# Altium PCB djb_v2_rigid_left_2.PcbDoc
Units mm, origin at the board's own origin, x right, y up, seen from the top; angles counter-clockwise.
Board outline 29 x 14.62 mm, 4 copper layers (Top Layer, Inner 1, Inner 2, Bottom Layer), stack 0.59 mm thick; 77 components, 44 nets, 258 pads, 92 vias.
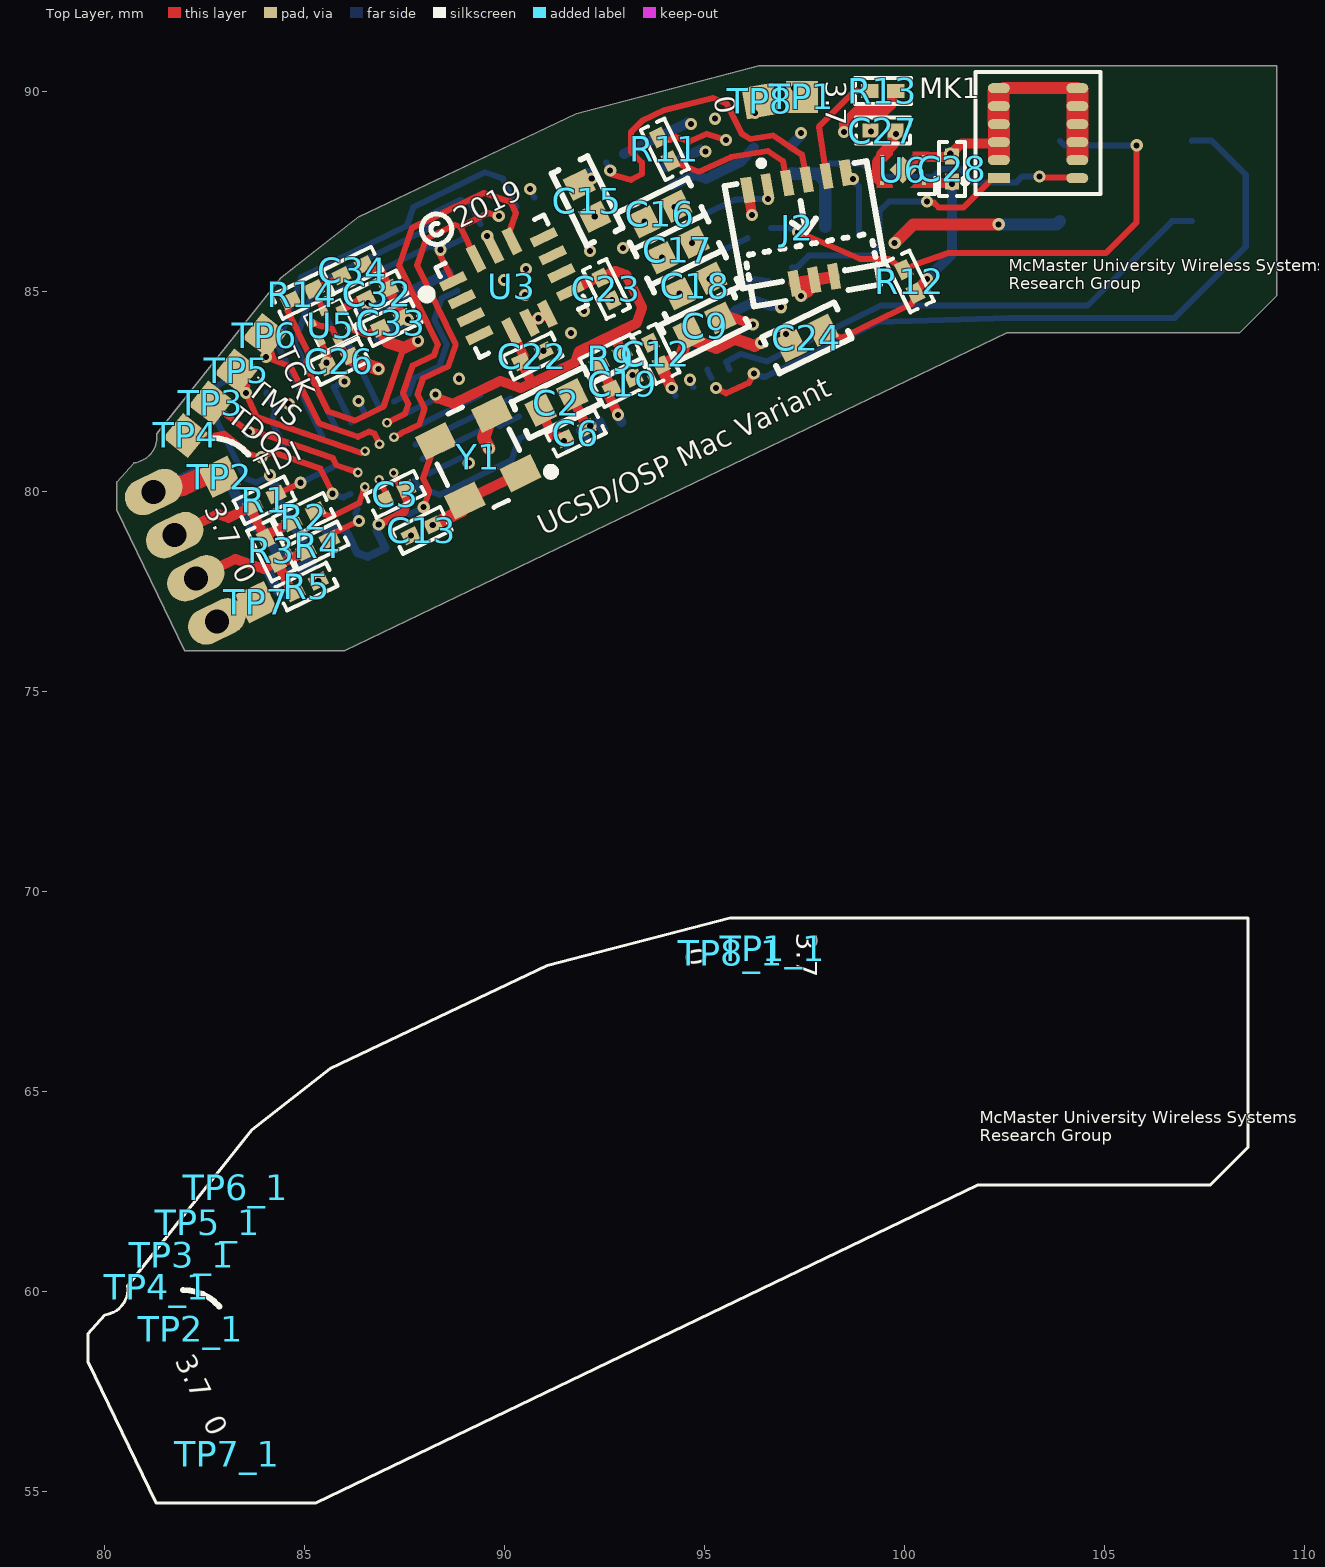
[diagram p0: Top Layer view]
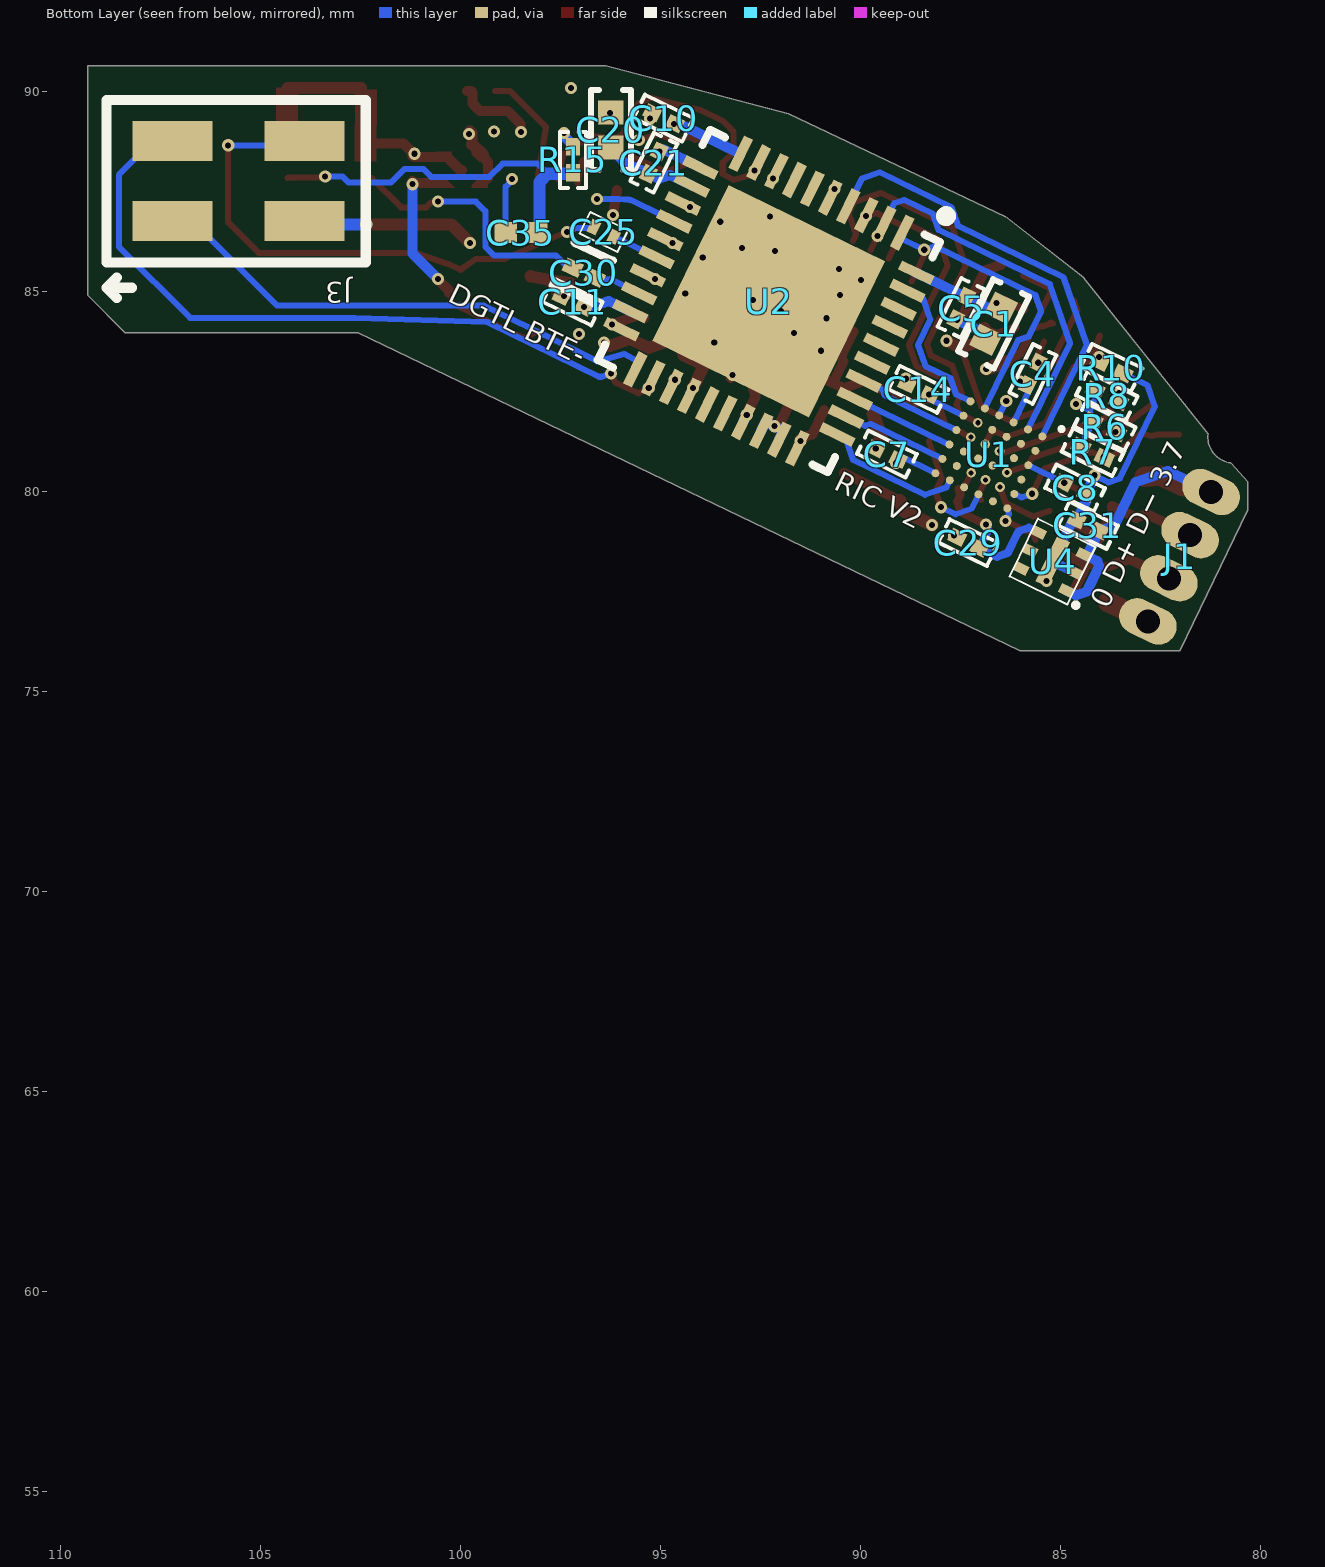
[diagram p1: Bottom Layer view, seen from below]
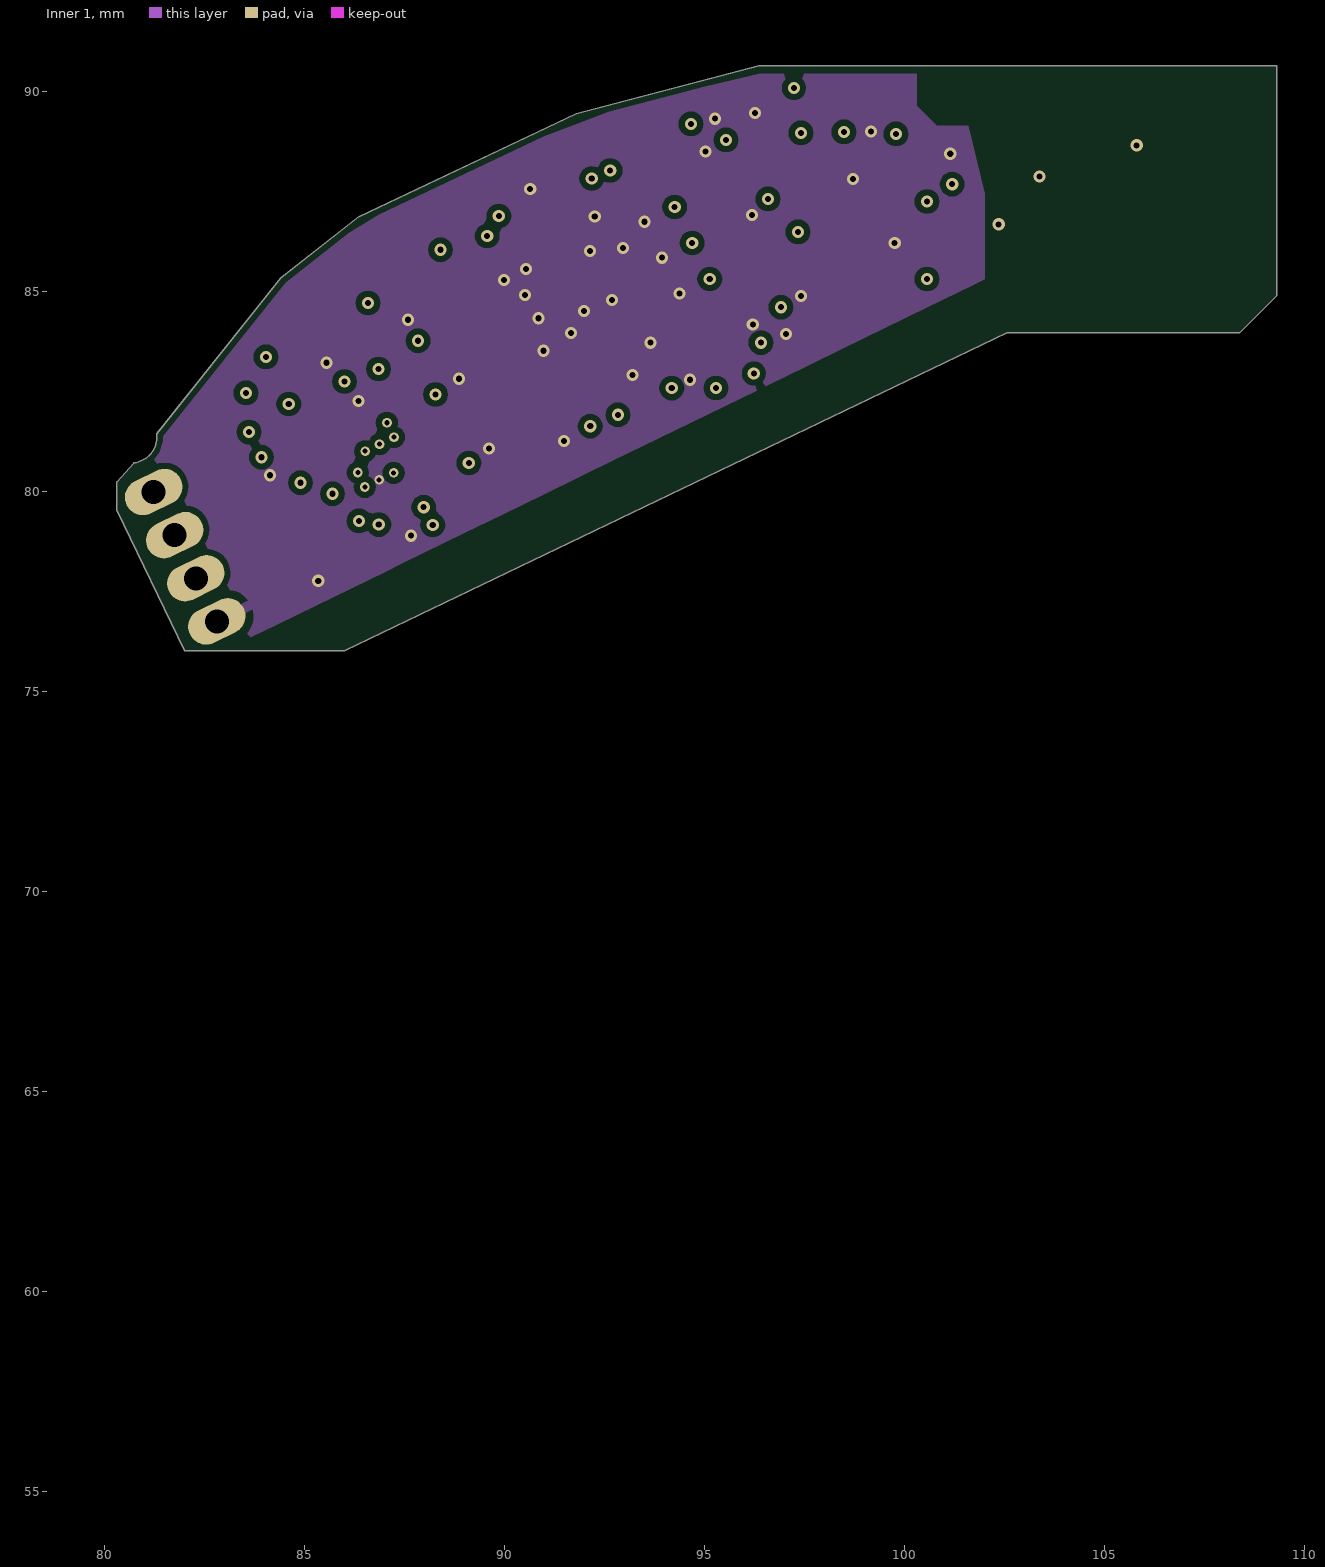
[diagram p2: Inner 1]
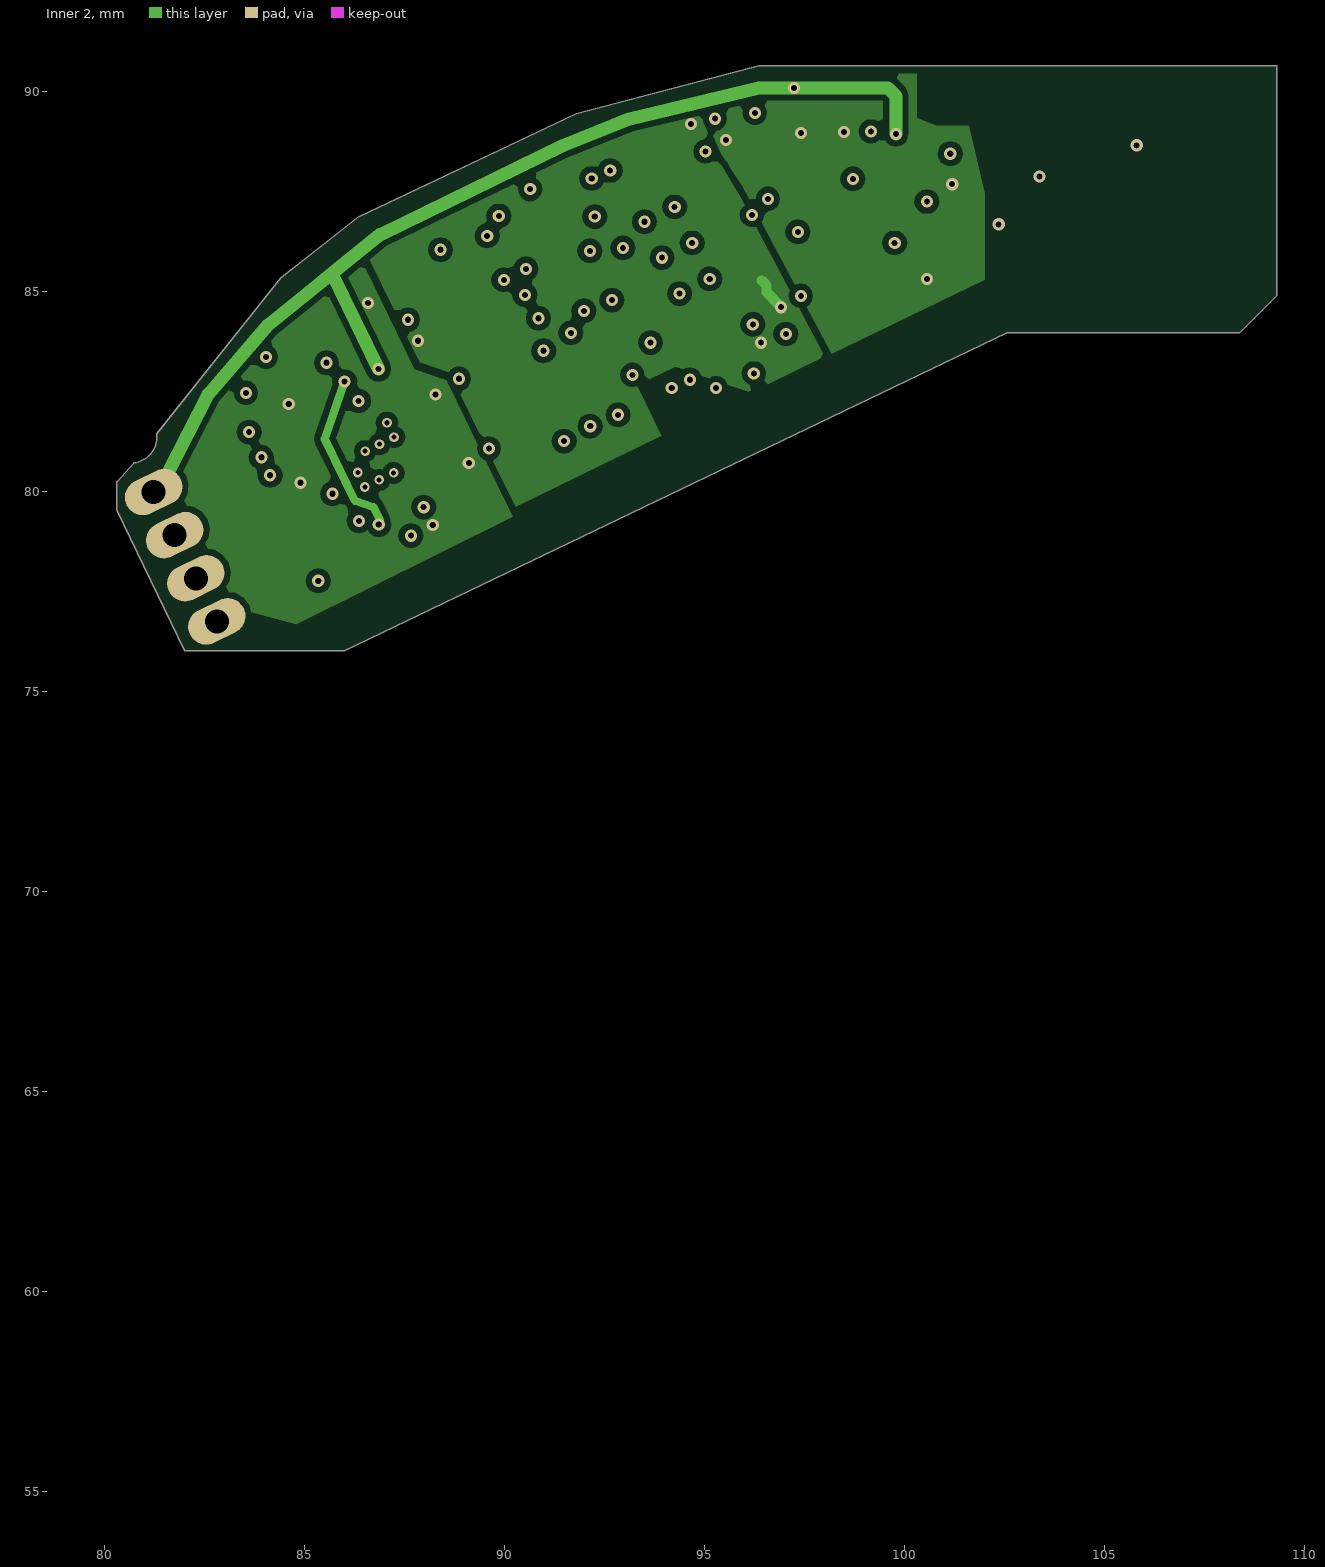
[diagram p3: Inner 2]

## Layer stack, top to bottom
Top Solder: solder mask 0.0102, Solder Resist, Dk 3.5
Top Layer: signal copper 0.0356
Dielectric 1: prepreg 0.0711, PP-006, Dk 4.1
Inner 1: signal copper 0.036
Dielectric 3: core 0.3048, Core-029, Dk 4.7
Inner 2: signal copper 0.036
Dielectric 2: prepreg 0.0711, PP-006, Dk 4.1
Bottom Layer: signal copper 0.0356
Bottom Solder: solder mask 0.0102, Solder Resist, Dk 3.5

## Board outline
80.307,79.538 80.307,80.238 80.732,80.713 ccw(c80.654,81.363) 81.304,81.441 84.407,85.338 86.363,86.871 91.791,89.446 96.36,90.638 109.307,90.638 109.307,84.899 108.371,83.963 102.557,83.963 85.999,76.013 82.007,76.013

## Design rules (kind name [scope] priority, off if disabled: settings)
BoardOutlineClearance BoardOutlineClearance_Silk [OnLayer('Top Overlay') Or OnLayer('Bottom Overlay')] p1: gap=0 ignorepadtopadclearanceinfootprint=FALSE
BoardOutlineClearance BoardOutlineClearance_Normal [All] p2: gap=0.152 ignorepadtopadclearanceinfootprint=FALSE
Clearance [All] p1: gap=0.152 ignorepadtopadclearanceinfootprint=FALSE
ComponentClearance [All] p1: gap=0 collisioncheckmode=3 verticalgap=0 showdistances=FALSE
DiffPairsRouting [All] p1: maxlimit=0.254 minlimit=0.152 mostfreqgap=0.254 toplayer_minwidth=0.152 toplayer_maxwidth=0.381 toplayer_prefwidth=0.254 midlayer1_minwidth=0.152 midlayer1_maxwidth=0.381 midlayer1_prefwidth=0.254 midlayer2_minwidth=0.152 midlayer2_maxwidth=0.381 midlayer2_prefwidth=0.254 bottomlayer_minwidth=0.152 bottomlayer_maxwidth=0.381 bottomlayer_prefwidth=0.254 maxuncoupledlength=12.7
MinimumSolderMaskSliver [All] p1: minsoldermaskwidth=0.006
PasteMaskExpansion [All] p1 off: expansion=0
PlaneClearance [All] p1: clearance=0.254
PlaneConnect PlaneConnect_Via [IsVia] p1: planeconnectstyle=Direct reliefexpansion=0.254 reliefentries=4 reliefconductorwidth=0.254 reliefairgap=0.203
PlaneConnect PlaneConnect_Normal [All] p2: pad.planeconnectstyle=Relief pad.reliefexpansion=0.254 pad.reliefentries=4 pad.reliefconductorwidth=0.254 pad.reliefairgap=0.203 via.planeconnectstyle=Direct via.reliefexpansion=0.254 via.reliefentries=4 via.reliefconductorwidth=0.254 via.reliefairgap=0.203
PolygonConnect PolygonConnect_Normal [All] p1: thpad.connectstyle=Relief thpad.reliefconductorwidth=0.254 thpad.reliefentries=4 thpad.polygonreliefangle="90 Angle" thpad.airgapwidth=0.203 smdpad.connectstyle=Relief smdpad.reliefconductorwidth=0.254 smdpad.reliefentries=4 smdpad.polygonreliefangle="90 Angle" smdpad.airgapwidth=0.203 via.connectstyle=Direct via.reliefconductorwidth=0.254 via.reliefentries=4 via.polygonreliefangle="90 Angle" via.airgapwidth=0.254
RoutingVias [All] p1: holewidth=0.152 width=0.305 viastyle="Through Hole" minholewidth=0.127 minwidth=0.241 maxholewidth=1.27 maxwidth=2.54
SilkToSilkClearance [All] p1: silktosilkclearance=-25.4
SilkToSolderMaskClearance [IsPad] p1: minsilkscreentomaskgap=-25.4 clearancetoexposedcopper=TRUE
SolderMaskExpansion [All] p1 off: expansion=0.102 istentingtop=FALSE
Width [All] p1: maxlimit=2.54 minlimit=0.152 preferedwidth=0.152
22 further rules are at their usual default settings.

## Components (designator, comment, footprint, x,y, rotation, side; value= is the part's Value field where it differs from the comment)
C1 "10uF" "CAP 0402/1005" 86.664,84.189 r116 bottom
C2 "10uF" "CAP 0402/1005" 91.296,82.22 r26 top
C3 "0.10uF" "CAP 0201/0603" 87.264,79.925 r206 top
C4 "0.10uF" "CAP 0201/0603" 85.684,82.937 r296 bottom
C5 "0.10uF" "CAP 0201/0603" 87.473,84.583 r296 bottom
C6 "0.10uF" "CAP 0201/0603" 91.781,81.455 r206 top
C7 "0.10uF" "CAP 0201/0603" 89.331,80.933 r26 bottom
C8 "0.10uF" "CAP 0201/0603" 84.627,80.085 r26 bottom
C9 "10uF" "CAP 0402/1005" 94.998,84.142 r26 top
C10 "0.10uF" "CAP 0201/0603" 94.915,89.331 r206 bottom
C11 "0.10uF" "CAP 0201/0603" 97.188,84.738 r206 bottom
C12 "0.10uF" "CAP 0201/0603" 93.784,83.439 r296 top
C13 "0.10uF" "CAP 0201/0603" 87.926,79.024 r26 top
C14 "0.10uF" "CAP 0201/0603" 88.542,82.551 r26 bottom
C15 "10uF" "CAP 0402/1005" 92.062,87.266 r296 top
C16 "10uF" "CAP 0402/1005" 93.892,86.935 r206 top
C17 "10uF" "CAP 0402/1005" 94.33,86.036 r206 top
C18 "10uF" "CAP 0402/1005" 94.769,85.137 r206 top
C19 "1uF" "CAP 0201/0603" 92.956,82.695 r206 top
C20 "10uF" "CAP 0402/1005" 96.231,89.038 r90 bottom
C21 "0.10uF" "CAP 0201/0603" 95.157,88.219 r296 bottom
C22 "0.10uF" "CAP 0201/0603" 90.697,83.38 r206 top
C23 "0.10uF" "CAP 0201/0603" 92.547,85.061 r116 top
C24 "10uF" "CAP 0402/1005" 97.557,83.838 r26 top
C25 "CL03A105KQ3CSNH" CL03A105KQ3CSNH 96.407,86.488 r206 bottom
C26 "1uF" "CAP 0201/0603" 85.866,83.248 r26 top
C27 "1uF" "CAP 0201/0603" 99.457,89.018 r0 top
C28 "1uF" "CAP 0201/0603" 101.189,88.063 r270 top
C29 "1uF" "CAP 0201/0603" 87.297,78.717 r206 bottom
C30 "GRM033R60J155ME14D" FP-GRM033-0_03-IPC_B 96.909,85.467 r25 bottom
C31 "1uF" "CAP 0201/0603" 84.305,79.149 r206 bottom
C32 "1uF" "CAP 0201/0603" 86.822,84.939 r206 top
C33 "1uF" "CAP 0201/0603" 87.172,84.22 r206 top
C34 "1uF" "CAP 0201/0603" 86.201,85.526 r206 top
C35 "CL03A104KQ3NNNC" CAPC0603X33X15ML03T05 98.482,86.469 r180 bottom
J1 "PIGTAIL" PIGTAIL 82.016,78.367 r116 bottom
J2 "FFC" HIROSE_FH58M-7S-0.25SHW-99 97.432,87.063 r190 top
J3 "M22-6550242R" M22-6550242R 105.537,87.757 r90 bottom
MK1 "VA1200AA" VA1200AA 104.317,87.832 r180 top
R1 "2k" "RES 0201/0603" 83.998,79.778 r26 top
R2 "100" "RES 0201/0603" 84.978,79.366 r26 top
R3 "115" "RES 0201/0603" 84.164,78.525 r116 top
R4 "100" "RES 0201/0603" 85.328,78.647 r26 top
R5 "2k" "RES 0201/0603" 85.05,77.621 r206 top
R6 "4.7k" "RES 0201/0603" 83.882,81.613 r26 bottom
R7 "4.7k" "RES 0201/0603" 84.189,80.984 r26 bottom
R8 "4.7k" "RES 0201/0603" 83.832,82.388 r26 bottom
R9 "1k" "RES 0201/0603" 92.649,83.325 r206 top
R10 "2.2k" "RES 0201/0603" 83.718,83.091 r26 bottom
R11 "1k" "RES 0201/0603" 94.007,88.552 r116 top
R12 "1k" "RES 0201/0603" 100.132,85.25 r296 top
R13 "1k" "RES 0201/0603" 99.457,90.013 r0 top
R14 "3k" "RES 0201/0603" 84.943,84.912 r26 top
R15 "1k" "RES 0201/0603" 97.182,88.288 r270 bottom
TP1 "TP_SMD_DJB" TP_SMD_DJB#1 97.432,89.863 r90 top
TP1_1 "TP_SMD_DJB" TP_SMD_DJB#2 96.707,68.563 r90 top (schematic designator TP1)
TP2 "TP_SMD_DJB" TP_SMD_DJB#1 82.882,80.363 r116 top
TP2_1 "TP_SMD_DJB" TP_SMD_DJB#2 82.157,59.063 r116 top (schematic designator TP2)
TP3 "TP_SMD_DJB" TP_SMD_DJB#3 82.657,82.213 r116 top
TP3_1 "TP_SMD_DJB" TP_SMD_DJB#4 81.932,60.913 r116 top (schematic designator TP3)
TP4 "TP_SMD_DJB" TP_SMD_DJB#3 82.025,81.4 r115 top
TP4_1 "TP_SMD_DJB" TP_SMD_DJB#4 81.3,60.1 r115 top (schematic designator TP4)
TP5 "TP_SMD_DJB" TP_SMD_DJB#3 83.307,83.013 r116 top
TP5_1 "TP_SMD_DJB" TP_SMD_DJB#4 82.582,61.713 r116 top (schematic designator TP5)
TP6 "TP_SMD_DJB" TP_SMD_DJB#3 84.007,83.902 r116 top
TP6_1 "TP_SMD_DJB" TP_SMD_DJB#4 83.282,62.602 r116 top (schematic designator TP6)
TP7 "TP_SMD_DJB" TP_SMD_DJB#1 83.794,77.231 r116 top
TP7_1 "TP_SMD_DJB" TP_SMD_DJB#2 83.069,55.931 r116 top (schematic designator TP7)
TP8 "TP_SMD_DJB" TP_SMD_DJB#5 96.382,89.763 r90 top
TP8_1 "TP_SMD_DJB" TP_SMD_DJB#6 95.657,68.463 r90 top (schematic designator TP8)
U1 "LCMXO3LF-1300E-XUWG36" BGA36_WLCS_25X25_MACHXO3 86.782,80.914 r296 bottom
U2 "ADAU1372" QFN40_LFCSP_WQ_6mmx6mm 92.283,84.759 r296 bottom
U3 "BMI160" LGA14R50P5X4_300X250X83 90.178,85.129 r26 top
U4 "MIC5367 LDO 1.2V" "LDO 1.2V" 85.19,78.246 r116 bottom
U5 "MIC5380/1-xxYFT" "06L FCSTSLP" 85.651,84.145 r206 top
U6 "MIC5504-1.8YMT" MICREL_DFN4 99.957,88.038 r90 top
Y1 "12.288 MHz" OSC_2.5X2.0MM 90.4,80.453 r116 top

## Footprints (in the part's own frame and the unit in brackets; to place one, negate y for a bottom-side part, rotate by r counter-clockwise, add the part's x,y. Pads: shape width x height; smd on the part's side, far side on the other; paste and mask are expansions set on the pad)
"06L FCSTSLP" [mm] "6-Pin 1mm x 1mm Thin MLF®   (FT)"
  oct 0.2x0.2 smd mask+0.01: 1(-0.4,0.25)
  rect 0.2x0.2 smd mask+0.01: 2(-0.4,-0.25) 3(0,-0.4) 4(0.4,-0.25) 5(0.4,0.25) 6(0,0.4)
  silkscreen extent -0.65,-0.5 0.5,0.5, body extent -0.5,-0.5 0.5,0.5, height 0.5
BGA36_WLCS_25X25_MACHXO3 [mm] "Lattice MachXO3 WLCSP36"
  round 0.2 smd: A1(-1,1) A2(-0.6,1) A3(-0.2,1) A4(0.2,1) A5(0.6,1) A6(1,1) B1(-1,0.6) B2(-0.6,0.6) B3(-0.2,0.6) B4(0.2,0.6) B5(0.6,0.6) B6(1,0.6) C1(-1,0.2) C2(-0.6,0.2) C3(-0.2,0.2) C4(0.2,0.2) C5(0.6,0.2) C6(1,0.2) D1(-1,-0.2) D2(-0.6,-0.2) D3(-0.2,-0.2) D4(0.2,-0.2) D5(0.6,-0.2) D6(1,-0.2) E1(-1,-0.6) E2(-0.6,-0.6) E3(-0.2,-0.6) E4(0.2,-0.6) E5(0.6,-0.6) E6(1,-0.6) F1(-1,-1) F2(-0.6,-1) F3(-0.2,-1) F4(0.2,-1) F5(0.6,-1) F6(1,-1)
  silkscreen extent -1.42,1.3 -1.33,1.4, body extent -1.27,-1.24 1.27,1.24, height 0.58
"CAP 0201/0603" [mm] "Chip Capacitor, 2-Leads, Body 0.60x0.30mm, IPC Medium Density"
  rect 0.4x0.35 smd: 1(-0.31,0) 2(0.31,0)
  silkscreen extent -0.68,-0.33 0.68,0.33, body extent -0.3,-0.15 0.3,0.15, height 0.3
"CAP 0402/1005" [mm] "Chip Capacitor, 2-Leads, Body 1.02x0.51mm, IPC Medium Density"
  rect 0.6x0.64 smd: 1(-0.44,0) 2(0.44,0)
  silkscreen extent -1,-0.5 1,0.5, body extent -0.5,-0.26 0.5,0.26, height 0.52
CAPC0603X33X15ML03T05 [mm] "Chip Capacitor, 2-Leads, Body 0.60x0.30mm, IPC Low Density"
  rect 0.56x0.52 smd: 1(-0.38,0) 2(0.38,0)
  body extent -0.32,-0.17 0.32,0.17, height 0.33
CL03A105KQ3CSNH [mm]
  rect 0.25x0.35 smd mask+0.05: 1(-0.275,0) 2(0.275,0)
  silkscreen extent -0.53,-0.3 0.52,0.3, body extent -0.3,-0.15 0.3,0.15, height 0.3
FP-GRM033-0_03-IPC_B [mm]
  rect 0.454x0.363 smd paste+0 mask+0: 1(-0.304,0) 2(0.304,0)
  silkscreen extent -0.53,-0.58 0.53,0.58, body extent -0.3,-0.15 0.3,0.15, height 0.33
HIROSE_FH58M-7S-0.25SHW-99 [mm] "Hirose FH58M-7S-0.25SHW(99) Top+Bottom Contacts 7-pin FFC Connector"
  rect 0.25x0.65 smd: 1(0.75,-0.7) 2(0.5,1.8) 3(0.25,-0.7) 4(0,1.8) 5(-0.25,-0.7) 6(-0.5,1.8) 7(-0.75,-0.7)
  rect 0.27x0.65 smd: S(-1.25,-0.7) S(1.25,-0.7)
  silkscreen extent -1.8,-1.32 1.8,2.2, body extent -1.75,-0.91 1.75,2.19, height 0.9
"LDO 1.2V" [mm] "6-Pin 1.6mmx1.6mm Thin MLF (MT)"
  rect 0.25x0.35 smd mask+0.01: 1(-0.5,-0.625) 2(0,-0.625) 3(0.5,-0.625) 4(0.5,0.625) 5(0,0.625) 6(-0.5,0.625)
  rect 1.26x0.35 smd mask+0.01: 7(0,0)
  silkscreen extent -0.8,-1.06 0.8,0.8, body extent -0.8,-0.8 0.8,0.8, height 0.8
LGA14R50P5X4_300X250X83 [mm]
  rect 0.675x0.25 smd: 1(-1.262,0.75) 2(-1.263,0.25) 3(-1.263,-0.25) 4(-1.262,-0.75) 8(1.262,-0.75) 9(1.262,-0.25) 10(1.263,0.25) 11(1.262,0.75)
  rect 0.25x0.675 smd: 5(-0.5,-1.013) 6(0,-1.013) 7(0.5,-1.013) 12(0.5,1.013) 13(0,1.013) 14(-0.5,1.012)
  silkscreen extent -2.1,-1.25 1.5,1.25, body extent -1.52,-1.27 1.52,1.27, height 0.83
M22-6550242R [mm] "4 Position Receptacle Connector 0.079\" (2.00mm) Surface Mount, Right Angle Gold"
  rect 1x2 smd: 1(-1,1.65) 2(1,1.65) 3(1,-1.65) 4(-1,-1.65)
  silkscreen extent -2.92,-3.18 2.03,3.3, body extent -2.15,-2.29 2.15,10.16, height 4.01
MICREL_DFN4 [mm] "Micrel DFN-4 from MIC5504-1.8YMT datasheet"
  rect 0.1x0.1 smd: 1(-0.325,-0.525) 2(0.325,-0.525) 3(0.325,0.525) 4(-0.325,0.525)
  rect 0.48x0.48 smd rot 45: EP(0,0)
  Top Layer region: -0.45,-0.18 -0.45,-0.65 -0.2,-0.65 -0.2,-0.43
  Top Layer region: 0.45,-0.65 0.2,-0.65 0.2,-0.43 0.38,-0.25 0.45,-0.25
  Top Layer region: -0.45,0.65 -0.2,0.65 -0.2,0.43 -0.38,0.25 -0.45,0.25
  Top Layer region: 0.45,0.65 0.2,0.65 0.2,0.43 0.38,0.25 0.45,0.25
  silkscreen extent -0.6,-0.8 -0.2,-0.4, body extent -0.5,-0.5 0.5,0.5, height 0.57
OSC_2.5X2.0MM [mm] "SMD MEMS oscillator, 2.5x2.0 mm"
  rect 0.65x0.85 smd: 1(0,0) 2(1.65,0) 3(1.65,1.55) 4(0,1.55)
  silkscreen extent -0.48,-0.8 2.13,1.77, body extent -0.48,-0.25 2.13,1.8, height 0.86
PIGTAIL [mm] "PIGTAIL"
  oval 0.9x1.5 hole 0.6: 1(1.8,0) 2(0.6,0) 3(-0.6,0) 4(-1.8,0)
QFN40_LFCSP_WQ_6mmx6mm [mm] "QFN, 40-Leads, Body 6.00x6.00mm, Pitch 0.50mm, Thermal Pad 4.35x4.35mm, IPC Medium Density"
  rect 0.9x0.25 smd: 1(-3,2.25) 2(-3,1.75) 3(-3,1.25) 4(-3,0.75) 5(-3,0.25) 6(-3,-0.25) 7(-3,-0.75) 8(-3,-1.25) 9(-3,-1.75) 10(-3,-2.25) 21(3,-2.25) 22(3,-1.75) 23(3,-1.25) 24(3,-0.75) 25(3,-0.25) 26(3,0.25) 27(3,0.75) 28(3,1.25) 29(3,1.75) 30(3,2.25)
  rect 0.25x0.9 smd: 11(-2.25,-3) 12(-1.75,-3) 13(-1.25,-3) 14(-0.75,-3) 15(-0.25,-3) 16(0.25,-3) 17(0.75,-3) 18(1.25,-3) 19(1.75,-3) 20(2.25,-3) 31(2.25,3) 32(1.75,3) 33(1.25,3) 34(0.75,3) 35(0.25,3) 36(-0.25,3) 37(-0.75,3) 38(-1.25,3) 39(-1.75,3) 40(-2.25,3)
  rect 4.35x4.35 smd: 41(0,0)
  silkscreen extent -3.97,-3.2 3.2,3.2, body extent -3.07,-3.07 3.07,3.07, height 0.8
"RES 0201/0603" [mm] "Chip Resistor, 2-Leads, Body 0.60x0.30mm, IPC Medium Density"
  rect 0.44x0.35 smd: 1(-0.325,0) 2(0.325,0)
  silkscreen extent -0.7,-0.33 0.7,0.33, body extent -0.3,-0.15 0.3,0.15, height 0.21
TP_SMD_DJB#1 [mm] "DJB style SMD test point"
  rect 0.8x0.8 smd paste-1000: 1(0,0)
TP_SMD_DJB#2 [mm] "DJB style SMD test point"
  rect 0.8x0.8 on Top Overlay paste-1000: 1(0,0)
TP_SMD_DJB#3 [mm] "DJB style SMD test point"
  rect 0.8x0.8 smd rot 116 paste-1000: 1(0,0)
TP_SMD_DJB#4 [mm] "DJB style SMD test point"
  rect 0.8x0.8 on Top Overlay rot 116 paste-1000: 1(0,0)
TP_SMD_DJB#5 [mm] "DJB style SMD test point"
  rect 0.8x0.8 smd rot 100 paste-1000: 1(0,0)
TP_SMD_DJB#6 [mm] "DJB style SMD test point"
  rect 0.8x0.8 on Top Overlay rot 100 paste-1000: 1(0,0)
VA1200AA [mm]
  rect 0.55x0.25 smd mask+0.07: 1(1.96,0)
  oval 0.55x0.25 smd mask+0.07: 2(1.96,-0.45) 3(1.96,-0.9) 4(1.96,-1.35) 5(1.96,-1.8) 6(1.96,-2.25) 7(0,-2.25) 8(0,-1.8) 9(0,-1.35) 10(0,-0.9) 11(0,-0.45) 12(0,0)
  silkscreen extent -0.58,-2.65 2.89,0.4, body extent 0.1,-2.5 1.95,0.25, height 0.93

## Part data
C1 C2 C9 C15 C16 C17 C18 C20 C24: library part C1005X5R0J106M050BC, "CAP CER 10UF 6.3V X5R 0402", Device Package="0402 (1005 Metric)", Manufacturer="TDK Corporation", Supplier Part Number 1=445-8920-2-ND, TemperatureCoefficient=X5R, TemperatureRange="-55C ~ 85C", Tolerance=20%, Voltage=6.3V, ComponentLink1Description=Datasheet, ComponentLink1URL=https://product.tdk.com/info/en/catalog/datasheets/mlcc_commercial_general_en.pdf, ComponentLink2Description="Digi-Key Listing", ComponentLink2URL=https://www.digikey.com/product-detail/en/tdk-corporation/C1005X5R0J106M050BC/445-8920-2-ND/3507809, PartId=12380, Part Number=C1005X5R0J106M050BC, Price=0.119, Supplier 1=Digi-Key
C3 C4 C5 C6 C7 C8 C10 C11 C12 C13 C14 C21 C22 C23: library part CL03A104KP3NNNC, "CAP CER 0.1UF 10V X5R 0201", Device Package="0201 (0603 Metric)", Manufacturer="Samsung Electro-Mechanics America, Inc.", Supplier Part Number 1=1276-1115-2-ND, TemperatureCoefficient=X5R, TemperatureRange="-55C ~ 85C", Tolerance=10%, Voltage=10V, ComponentLink1Description=Datasheet, ComponentLink1URL=http://www.samsungsem.com/kr/support/product-search/mlcc/__icsFiles/afieldfile/2016/08/18/S_CL03A104KP3NNND.pdf, ComponentLink2Description="Digi-Key Listing", ComponentLink2URL=https://www.digikey.com/product-detail/en/samsung-electro-mechanics-america-inc/CL03A104KP3NNNC/1276-1115-2-ND/3886773, PartId=20562, Part Number=CL03A104KP3NNNC, Price=0.0031, Supplier 1=Digi-Key
C19 C26 C27 C28 C29 C31 C32 C33 C34: library part 02016D105MAT2A, "CAP CER 1UF 6.3V X5R 0201", Device Package="0201 (0603 Metric)", Manufacturer="AVX Corporation", Supplier Part Number 1=478-7862-2-ND, TemperatureCoefficient=X5R, TemperatureRange="-55C ~ 85C", Tolerance=20%, Voltage=6.3V, ComponentLink1Description=Datasheet, ComponentLink1URL=http://datasheets.avx.com/cx5r.pdf, ComponentLink2Description="Digi-Key Listing", ComponentLink2URL=https://www.digikey.com/product-detail/en/avx-corporation/02016D105MAT2A/478-7862-2-ND/3079664, PartId=20442, Part Number=02016D105MAT2A, Price=0.063, Supplier 1=Digi-Key
C25: "1 µF ±10% 6.3V Ceramic Capacitor X5R 0201 (0603 Metric)", Supplier Part Number 1=1276-6440-1-ND, Supplier 1=Digi-Key
C30: library part CMP-06035-017352-1, "Chip Multilayer Ceramic Capacitors for General Purpose, 0201, 1.5uF, X5R, 15%, 20%, 6.3V", Capacitance=1.5uF, Case Code (Imperial)=0201, Case Code (Metric)=0603, Dielectric=X5R, Max Operating Temperature=85°C, Min Operating Temperature=-55°C, Tolerance=20%, Voltage Rating=6.3V, Case/Package=0201, Length=0.024inch, Mount="Surface Mount", Packaging="Tape and Reel", Thickness=0.013inch, Voltage Rating (DC)=6.3V, Width=0.012inch
C35: library part CMP-2010-00674-1, Manufacturer=Samsung, Part Number=CL03A104KQ3NNNC
J2: library part HIROSE_FH58M-7S-0.25SHW-99, "Hirose FH58M-7S-0.25SHW(99) 7-pin Top+Bottom Contact FFC Connector"
J3: "4 Position Receptacle Connector 0.079\" (2.00mm) Surface Mount, Right Angle Gold", Supplier Part Number 1=952-3188-1-ND, Supplier 1=Digi-Key
MK1: "Bone Conductor Sensor Accelerometer"
R1 R5: library part RC0201FR-072KL, "RES SMD 2K OHM 1% 1/20W 0201", Device Package="0201 (0603 Metric)", Manufacturer=Yageo, PowerRating="0.05W, 1/20W", Supplier Part Number 1=YAG2280TR-ND, TemperatureCoefficient=200ppm/C, TemperatureRange="-55C ~ 125C", Tolerance=1%, ComponentLink1Description=Datasheet, ComponentLink1URL=http://www.yageo.com/documents/recent/PYu-RC_Group_51_RoHS_L_04.pdf, ComponentLink2Description="Digi-Key Listing", ComponentLink2URL=https://www.digikey.com/product-detail/en/yageo/RC0201FR-072KL/YAG2280TR-ND/3202400, PartId=19505, Part Number=RC0201FR-072KL, Price=0.0042, Supplier 1=Digi-Key
R2 R4: library part RC0603F101CS, "RES SMD 100 OHM 1% 1/20W 0201", Device Package="0201 (0603 Metric)", Manufacturer="Samsung Electro-Mechanics America, Inc.", PowerRating="0.05W, 1/20W", Supplier Part Number 1=1276-3601-2-ND, TemperatureCoefficient=250ppm/C, TemperatureRange="-55C ~ 125C", Tolerance=1%, ComponentLink1Description=Datasheet, ComponentLink1URL=//media.digikey.com/pdf/Data%20Sheets/Samsung%20PDFs/RC_Series_ds.pdf, ComponentLink2Description="Digi-Key Listing", ComponentLink2URL=https://www.digikey.com/product-detail/en/samsung-electro-mechanics-america-inc/RC0603F101CS/1276-3601-2-ND/3963908, PartId=19787, Part Number=RC0603F101CS, Price=0.0081, Supplier 1=Digi-Key
R3: library part RC0201FR-07115RL, "RES SMD 115 OHM 1% 1/20W 0201", Device Package="0201 (0603 Metric)", Manufacturer=Yageo, PowerRating="0.05W, 1/20W", Supplier Part Number 1=YAG2383TR-ND, TemperatureCoefficient=200ppm/C, TemperatureRange="-55C ~ 125C", Tolerance=1%, ComponentLink1Description=Datasheet, ComponentLink1URL=http://www.yageo.com/documents/recent/PYu-RC_Group_51_RoHS_L_04.pdf, ComponentLink2Description="Digi-Key Listing", ComponentLink2URL=https://www.digikey.com/product-detail/en/yageo/RC0201FR-07115RL/YAG2383TR-ND/5280243, PartId=20289, Part Number=RC0201FR-07115RL, Price=0.0042, Supplier 1=Digi-Key
R6 R7 R8: library part RC0201FR-074K7L, "RES SMD 4.7K OHM 1% 1/20W 0201", Device Package="0201 (0603 Metric)", Manufacturer=Yageo, PowerRating="0.05W, 1/20W", Supplier Part Number 1=311-4.70KMTR-ND, TemperatureCoefficient=200ppm/C, TemperatureRange="-55C ~ 125C", Tolerance=1%, ComponentLink1Description=Datasheet, ComponentLink1URL=http://www.yageo.com/documents/recent/PYu-RC_Group_51_RoHS_L_04.pdf, ComponentLink2Description="Digi-Key Listing", ComponentLink2URL=https://www.digikey.com/product-detail/en/yageo/RC0201FR-074K7L/311-4.70KMTR-ND/1948894, PartId=19526, Part Number=RC0201FR-074K7L, Price=0.0056, Supplier 1=Digi-Key
R9 R11 R12 R13 R15: library part RC0201JR-071KL, "RES SMD 1K OHM 5% 1/20W 0201", Device Package="0201 (0603 Metric)", Manufacturer=Yageo, PowerRating="0.05W, 1/20W", Supplier Part Number 1=311-1KNTR-ND, TemperatureCoefficient=200ppm/C, TemperatureRange="-55C ~ 125C", Tolerance=5%, ComponentLink1Description=Datasheet, ComponentLink1URL=http://www.yageo.com/documents/recent/PYu-RC_Group_51_RoHS_L_04.pdf, ComponentLink2Description="Digi-Key Listing", ComponentLink2URL=https://www.digikey.com/product-detail/en/yageo/RC0201JR-071KL/311-1KNTR-ND/1948922, PartId=19463, Part Number=RC0201JR-071KL, Price=0.0042, Supplier 1=Digi-Key
R10: library part RC0603F222CS, "RES SMD 2.2K OHM 1% 1/20W 0201", Device Package="0201 (0603 Metric)", Manufacturer="Samsung Electro-Mechanics America, Inc.", PowerRating="0.05W, 1/20W", Supplier Part Number 1=1276-3634-2-ND, TemperatureCoefficient=250ppm/C, TemperatureRange="-55C ~ 125C", Tolerance=1%, ComponentLink1Description=Datasheet, ComponentLink1URL=//media.digikey.com/pdf/Data%20Sheets/Samsung%20PDFs/RC_Series_ds.pdf, ComponentLink2Description="Digi-Key Listing", ComponentLink2URL=https://www.digikey.com/product-detail/en/samsung-electro-mechanics-america-inc/RC0603F222CS/1276-3634-2-ND/3963941, PartId=19542, Part Number=RC0603F222CS, Price=0.0019, Supplier 1=Digi-Key
R14: library part RC0201FR-073KL, "RES SMD 3K OHM 1% 1/20W 0201", Device Package="0201 (0603 Metric)", Manufacturer=Yageo, PowerRating="0.05W, 1/20W", Supplier Part Number 1=YAG2656TR-ND, TemperatureCoefficient=200ppm/C, TemperatureRange="-55C ~ 125C", Tolerance=1%, ComponentLink1Description=Datasheet, ComponentLink1URL=http://www.yageo.com/documents/recent/PYu-RC_Group_51_RoHS_L_04.pdf, ComponentLink2Description="Digi-Key Listing", ComponentLink2URL=https://www.digikey.com/product-detail/en/yageo/RC0201FR-073KL/YAG2656TR-ND/5280516, PartId=19520, Part Number=RC0201FR-073KL, Price=0.0042, Supplier 1=Digi-Key
TP1 TP1_1 TP2 TP2_1 TP3 TP3_1 TP4 TP4_1 TP5 TP5_1 TP6 TP6_1 TP7 TP7_1 TP8 TP8_1: "Digital Jellybean Style SMD Test Point", DNP=DNP
U1: "Lattice MachXO3 36-ball 2.5x2.5mm FPGA"
U2: "Analog Devices CODEC"
U3: library part BMI160_1, "BMI160 2.5 x 3 mm Tiaxial Accelerometer / Gyroscope Inertial Measurement Unit", Package="LGA-14 Bosch", Availability=Good, MF=Bosch, MP=BMI160, Price="3.29 USD"
U4: Supplier Part Number 1=576-3723-6-ND, Supplier 1=Digi-Key
U5: "LDO 2fixed Outputs", Supplier Part Number 1=576-3453-6-ND, Supplier 1=Digi-Key
U6: library part MICREL_MIC5504-1.8YMT, "Micrel MIC5504-1.8YMT 1.8V 300mA LDO"
Y1: library part MC_DSC1033DI2-012.2880, "Microchip 12.288 MHz SMD MEMS Oscillator", DIGIKEY_PN=DSC1033DI2-012.2880-ND

## Via types
v1: diameter 0.305, hole 0.152, Top Layer to Bottom Layer, tented both sides, 80 vias
v2: diameter 0.241, hole 0.127, Top Layer to Bottom Layer, tented both sides, 8 vias
v3: diameter 0.305, hole 0.152, Top Layer to Bottom Layer, 2 vias
v4: diameter 0.308, hole 0.152, Top Layer to Bottom Layer, tented both sides, 2 vias

## Nets (pads, with @x,y where several pads share a name; then routed paths per layer and width w, separated by ;. In a path a pad name is that pad's centre, name@x,y a point inside that pad or via, vN(x,y) a via of type N, cw(c..) or ccw(c..) an arc to the next point about the centre after c; other vN are vias at no path point)
+1V2_D: C3.1 C4.2 C29.2 U1.C1 U1.D5 U4.4 | length 9.9
  Top Layer w0.152: v2(87.225,80.462) 87.396,80.112 C3.1
  Top Layer w0.203: v1(86.854,79.169) 87.483,79.476 87.575,79.743 87.492,79.914 C3.1
  Inner 2 w0.203: v1(85.999,82.746) 85.505,81.309 86.256,79.767 86.724,79.606 86.889,79.269 v1(86.854,79.169)
  Bottom Layer w0.152: C4.2@85.73,82.615 U1.C1 ; C4.2 v1(85.999,82.746)
  Bottom Layer w0.203: U4.4 85.78,79.09 86.039,79.001 86.072,78.934 86.08,78.931 86.311,78.459 86.578,78.367 C29.2 86.804,79.022 v1(86.854,79.169)
+1V8: C24.2 C28.2 R11.2 R12.2 R13.2 R15.1 U6.1 | length 10.9
  Top Layer w0.152: R11.2 94.132,88.788 94.282,88.863 94.603,88.738 95.057,88.938 v1(95.536,88.788) ; C24.2 98.432,83.838 99.074,84.15 100.182,84.688 R12.2
  Top Layer w0.254: v1(98.482,88.988) 98.492,88.998 98.492,89.188 98.817,89.513 99.507,89.513 99.689,89.695 99.689,89.965 99.737,90.013 R13.2 R13.2@99.827,90.013 ; R12.2 100.274,85.016 100.557,85.299 v3(100.557,85.313) ; U6.1 101.149,87.713 C28.2 v1(101.189,87.68)
  Bottom Layer w0.254: R15.1 97.157,88.638 97.407,88.888 v1(97.407,88.963) ; v3(100.557,85.313) 101.189,85.945 v1(101.189,87.68)
+3V3_A: C9.1 C10.2 C11.2 C12.2 C33.2 R14.1 U2.10 U2.19 U2.24 U5.1 | length 16.3
  Top Layer w0.152: R14.1 84.57,84.536 85.107,83.435 85.015,83.167 85.585,81.999 86.254,81.769 86.973,82.119 87.479,83.59
  Top Layer w0.203: U5.1 86.588,83.935 C33.2
  Top Layer w0.305: C33.2 87.065,83.733 87.479,83.59 v1(87.839,83.766) ; v1(94.18,82.581) 93.91,83.133 C12.2 94.414,83.401 C9.1 ; C9.1@94.673,83.806 C9.1 ; v1(96.407,83.718) 96.246,83.638 95.744,83.811 95.284,83.587 94.678,83.796 C9.1
  Inner 2 w0.254: 96.425,85.275 96.55,85.15 96.55,84.976 96.907,84.619 v1(96.907,84.605)
  Bottom Layer w0.152: v1(94.18,82.581) U2.24
  Bottom Layer w0.254: U2.10 94.577,89.216 C10.2 ; U2.19 96.282,84.759 96.632,84.638 v1(96.907,84.605)
  Bottom Layer w0.305: v1(96.907,84.605) C11.2
  other v1: 94.657,89.188
+3V3_D: C1.2 C5.1 C7.1 C8.2 C13.2 C14.1 C22.2 C23.2 C32.2 R1.2 R6.2 R7.2 R8.2 R9.1 U1.A3 U1.F2 U1.F6 U2.40 U3.5 U3.8 U5.2 Y1.1 Y1.4 | length 22.5
  Top Layer w0.152: R1.2 v1(84.897,80.217)
  Top Layer w0.203: U5.2 86.386,84.782 86.52,84.736 v1(86.587,84.713)
  Top Layer w0.254: v1(88.273,82.42) 88.317,82.33 88.718,82.192 89.886,82.762 90.408,82.582 90.677,82.714 ; Y1.4 Y1.1 ; U3.5 90.469,83.391 C22.2 90.677,82.714 ; U3.8 92.358,85.358 C23.2 92.762,85.511 93.043,85.414 93.437,84.605 93.299,84.204 92.76,83.941 ; R9.1 92.739,83.881 92.76,83.941 ; 90.677,82.714 90.691,82.709 91.769,83.235 91.861,83.502 92.76,83.941
  Top Layer w0.33: v1(88.205,79.16) 88.915,79.506 Y1.4
  Bottom Layer w0.152: R8.2@84.047,82.473 84.266,82.023 ; R7.2@84.474,81.107 R7.2 R6.2 84.266,82.023 ; v1(84.603,82.188) 84.266,82.023 ; C8.2 U1.A3 ; U1.F2 88.308,82.325 88.312,82.339 v1(88.273,82.42) ; U1.F6 89.009,80.887 89.022,80.883 89.062,80.802 v1(89.106,80.712)
  Bottom Layer w0.254: v1(86.587,84.713) 86.443,84.643 86.385,84.614 C1.2 86.535,84.562 86.645,84.524 86.672,84.537 C5.1 87.351,84.857 U2.40
+3V7: C26.2 C27.2 C31.2 J1.1 TP1.1 TP2.1 U4.1 U4.3 U5.4 U5.6 U6.3 U6.4 | length 37.8
  Top Layer w0.152: U5.4 85.227,84.216 85.255,84.206 85.266,84.186 85.445,84.124 85.466,84.134 85.695,84.055 U5.6
  Top Layer w0.203: U5.6 85.997,83.435 C26.2
  Top Layer w0.254: U6.4 99.307,87.838 99.307,88.238 U6.3 99.432,88.413 ; 99.699,88.68 99.699,88.97 99.747,89.018 C27.2
  Top Layer w0.305: 99.432,88.413 99.699,88.68
  Top Layer w0.33: C26.2 86.193,83.286 v1(86.848,83.06)
  Top Layer w0.508: J1.1 81.957,80.138 82.507,80.388 TP2.1
  Inner 2 w0.33: J1.1@81.316,79.939 82.593,82.431 84.086,84.161 85.124,84.997 85.703,85.464 ; v1(86.848,83.06) 85.691,85.431 85.703,85.464 ; v1(99.782,88.938) 99.782,89.886 99.58,90.088 96.35,90.088 93.123,89.313 91.465,88.65 86.881,86.414 85.703,85.464
  Bottom Layer w0.254: J1.1@81.139,80.164 J1.1@81.206,80.141 ; J1.1 82.306,80.511 83.115,80.232 83.645,79.145 C31.2 84.296,78.461 U4.3 84.072,78.257 84.026,78.123 84.333,77.494 84.601,77.402 U4.1
  other v1: 97.232,90.088
BCLK: U1.F5 U2.32 | length 2.7
  Bottom Layer w0.152: U1.F5 89.741,81.69 89.882,81.641 U2.32
CCLK: U1.F1 U2.39 | length 3.8
  Bottom Layer w0.152: U1.F1 87.602,82.426 87.74,82.827 88.369,83.134 88.553,83.669 88.247,84.298 88.428,84.826 U2.39
CS_C: U1.A1 U2.4 | length 11
  Bottom Layer w0.152: U1.A1 84.331,83.657 84.915,85.352 87.557,86.64 87.716,87.101 89.511,87.976 89.954,87.824 U2.4
CS_I: U1.E2 U3.12 | length 9.6
  Top Layer w0.152: v2(87.058,81.716) 87.508,81.935 87.593,82.182 87.461,82.452 87.698,83.141 88.238,83.404 88.33,83.671 87.365,85.649 87.688,86.585 89.485,87.462 90.154,87.231 90.285,86.962 90.101,86.427 U3.12
DMIC: U1.F3 U2.34 | length 2.7
  Bottom Layer w0.152: U1.F3 89.391,82.409 89.434,82.536 U2.34
DSPK: U1.F4 U2.33 | length 2.6
  Bottom Layer w0.152: U1.F4 87.775,81.17 U2.33
GND: C1.1 C2.1 C3.2 C4.1 C5.2 C6.2 C7.2 C8.1 C9.2 C10.1 C11.1 C12.1 C13.1 C14.2 C15.2 C16.2 C17.2 C18.2 C19.1 C20.2 C21.1 C22.1 C23.1 C24.1 C26.1 C27.1 C28.1 C29.1 C31.1 C32.1 C33.1 C34.1 C35.1 J1.4 J2.2 J2.4 J2.6 J2.S J3.4 MK1.2 MK1.3 MK1.4 MK1.5 MK1.6 MK1.7 MK1.8 MK1.9 MK1.10 MK1.11 R5.1 R10.1 TP7.1 TP8.1 U1.C5 U1.D1 U2.5 U2.11 U2.20 U2.23 U2.30 U2.41 U3.6 U3.7 U4.2 U4.7 U5.5 U6.2 U6.EP Y1.2 | length 30.7
  Top Layer w0.152: U5.5 85.64,83.277 C26.1 ; v2(86.865,80.287) 87.036,79.936 C3.2
  Top Layer w0.254: C34.1 86.881,85.524 C32.1 C33.1 ; U3.6 v1(90.846,84.329) U3.7 ; C2.1 91.195,81.425 C6.2 ; v1(93.195,82.912) C19.1 ; C9.2 95.537,84.405 v1(96.206,84.175) ; J2.S@96.079,87.535 v1(96.182,86.913) ; 97.498,85.247 97.473,85.147 v1(97.407,84.888) 97.409,84.889 97.607,84.988 J2.4 ; C27.1 99.147,89.008 v1(99.157,88.998) ; U6.EP 100.007,88.038 100.332,88.363 ; 100.382,88.363 U6.2 101.141,88.363 C28.1@101.142,88.373 ; v1(101.142,88.442) 101.142,88.421 C28.1 ; C28.1@101.164,88.442 101.422,88.701 MK1.3@102.357,88.701
  Top Layer w0.305: J2.2 97.498,85.247 J2.4 J2.6 ; v1(99.752,86.211) 100.216,86.675 v4(102.35,86.675) ; MK1.6@102.48,90.082 MK1.7
  Top Layer w0.33: v1(89.61,81.069) 89.474,81.348 Y1.2
  Top Layer w0.508: J1.4 TP7.1
  Bottom Layer w0.152: R10.1 82.819,82.652 82.635,82.118 83.511,80.32 83.792,80.223 v1@84.134,80.39 ; v1(86.348,82.26) U1.D1 ; v1(90.64,87.557) U2.5 ; v1(91.488,81.256) U2.30 ; v1(94.634,82.791) U2.23 ; U2.20 95.968,84.059 v1(96.206,84.175) ; v1(98.707,87.813) 98.707,87.772 98.862,87.617 C35.1 ; v1(101.142,88.442) v1@101.164,88.442
  Bottom Layer w0.254: v1@84.134,80.39 C8.1 84.312,79.842 C31.1 84.704,79.244 U4.7 U4.2 ; C1.1 86.917,83.967 v1(87.582,84.291) ; U2.41@93.182,82.917 v1(93.195,82.912) ; U2.11 C21.1@94.901,88.54 ; v1(97.407,84.888) 97.453,84.888 C11.1
  Bottom Layer w0.305: v4(102.35,86.675) 103.805,86.675 J3.4
  other v1: 85.342,77.764 87.657,78.893 84.138,80.403 88.858,82.816 85.548,83.216 90.976,83.516 93.648,83.717 97.032,83.935 91.657,83.963 91.982,84.513 92.683,84.782 90.507,84.913 94.373,84.944 89.982,85.288 90.532,85.563 93.935,85.843 92.132,86.013 92.957,86.088 93.497,86.742 92.255,86.871 95.021,88.498 95.257,89.318 96.257,89.463
LPRE_N: R2.2 U1.B5 | length 1.6
  Top Layer w0.152: R2.2 85.671,79.371 86.368,79.71 v2(86.506,80.112)
LPRE_P: R4.2 U1.A6 | length 1.3
  Top Layer w0.152: R4.2 85.667,78.923 v1(86.363,79.263)
  Bottom Layer w0.152: U1.A6 86.276,79.443 v1(86.363,79.263)
LRCLK: U1.E6 U2.31 | length 3.6
  Bottom Layer w0.152: U1.E6 87.847,80.098 88.382,79.914 90.18,80.791 90.362,81.319 U2.31
LVDS_N: J1.2 R1.1 R2.1 R3.2 | length 3.9
  Top Layer w0.254: J1.2 82.832,79.432 83.099,79.34 R1.1 83.671,79.536 R3.2 84.057,78.917 R2.1
LVDS_P: J1.3 R3.1 R4.1 R5.2 | length 3.9
  Top Layer w0.254: J1.3 83.268,78.31 83.97,78.068 R3.1 ; R5.2 84.658,77.513 R3.1 ; R4.1 84.407,78.198 R3.1
MIC1: J2.5 U2.9 | length 8.1
  Top Layer w0.152: v1(92.639,88.021) 92.687,87.922 93.163,87.788 93.435,87.934 93.435,88.22 93.163,88.492 93.163,88.989 93.437,89.263 94.007,89.538 95.207,89.838 95.548,89.692 95.932,88.938 96.144,88.808 96.712,88.897 97.432,88.418 J2.5
  Bottom Layer w0.152: U2.9 v1(92.639,88.021)
MIC2: J2.1 U2.14 | length 2.1
  Bottom Layer w0.152: U2.14 94.984,86.917 95.721,87.276 cw(c95.788,87.139) 95.775,87.291 96.043,87.313 v1(96.582,87.313)
MIC3: C25.2 U2.16 | length 1.1
  Bottom Layer w0.152: U2.16 C25.2@96.069,86.328
MIC4: C30.1 U2.18 | length 1.1
  Bottom Layer w0.152: U2.18 96.257,85.313 C30.1@96.578,85.264
MISO: U1.E1 U2.1 U3.1 | length 7.9
  Top Layer w0.152: v1(88.398,86.041) 88.369,85.958 U3.1
  Bottom Layer w0.152: U1.E1 86.05,83.783 85.783,83.875 85.476,84.505 85.614,84.906 88.13,86.133 v1(88.398,86.041) U2.1@88.937,86.304
MOSI: U1.E3 U2.3 U3.14 | length 9.1
  Top Layer w0.152: v2(87.234,81.357) 87.413,81.444 87.415,81.449 87.864,81.668 88.001,82.065 87.826,82.424 87.964,82.825 88.593,83.132 88.777,83.667 87.813,85.644 88.043,86.313 88.762,86.664 88.896,86.618 ; U3.14 88.896,86.618 ; v1(89.855,86.885) 89.882,86.876 89.864,86.867 89.851,86.872 89.597,86.96 88.896,86.618
  Bottom Layer w0.152: U2.3 v1(89.855,86.885)
NetC2_2: C2.2 C6.1 U2.28 U2.29 | length 1.9
  Top Layer w0.254: C2.2 91.678,82.373 C6.1
  Bottom Layer w0.254: U2.29 91.916,81.521 v1(92.14,81.63) 92.365,81.74 U2.28
NetC15_1: C15.1 U2.8 | length 0.3
  Top Layer w0.152: C15.1@92.156,87.757 v1(92.179,87.824)
  Bottom Layer w0.152: U2.8 v1(92.179,87.824)
NetC16_1: C16.1 U2.13 | length 0
  Top Layer w0.152: v1(94.252,87.11) C16.1
NetC17_1: C17.1 U2.15 | length 0
  Top Layer w0.152: v1(94.69,86.211) C17.1
NetC18_1: C18.1 U2.17 | length 0
  Top Layer w0.152: v1(95.128,85.313) C18.1
NetC19_2: C19.2 R9.2 U2.27 | length 1.6
  Top Layer w0.254: R9.2 92.377,83.175 C19.2 92.613,82.372 v1(92.836,81.914)
  Bottom Layer w0.254: v1(92.836,81.914) U2.27
NetC20_1: C20.1 C21.2 U2.12 | length 2.4
  Bottom Layer w0.254: U2.12 94.751,87.91 95.032,87.814 C21.2 95.907,88.238 C20.1
NetC25_1: C25.1 J3.3 R12.1 | length 13.7
  Top Layer w0.152: v1(97.332,86.488) 98.882,85.813 99.607,85.813 R12.1 100.307,85.688 101.093,85.962 105.037,85.962 105.8,86.725 v4(105.8,88.65)
  Bottom Layer w0.152: C25.1@96.656,86.586 97.102,86.586 97.102,86.58 v1(97.332,86.488) ; J3.3 103.994,88.65 v4(105.8,88.65)
NetC30_2: C30.2 MK1.1 | length 6.7
  Top Layer w0.152: v3(100.557,87.247) 100.586,87.217 100.732,87.217 100.848,87.102 101.477,87.102 102.207,87.832 MK1.1
  Bottom Layer w0.152: C30.2 97.303,85.595 97.6,85.893 99.149,85.893 99.371,86.115 99.371,87.007 99.61,87.247 v3(100.557,87.247)
NetC34_2: C34.2 R14.2 U5.3 | length 1.4
  Top Layer w0.152: U5.3 85.224,85.021 R14.2 C34.2
NetC35_2: C35.2 MK1.12 R15.2 | length 9.1
  Top Layer w0.152: v1(103.375,87.875) 103.399,87.851 104.298,87.851 MK1.12
  Bottom Layer w0.152: 97.814,87.942 98.066,88.194 98.937,88.194 99.268,87.863 100.724,87.863 100.922,88.061 101.389,88.061 101.725,87.725 ; 102.795,87.725 102.945,87.875 v1(103.375,87.875)
  Bottom Layer w0.154: 101.725,87.725 102.795,87.725
  Bottom Layer w0.305: R15.2 97.203,87.942 97.814,87.942 98.018,87.738 C35.2@98.018,86.607
NetJ2_3: J2.3 R11.1 | length 3.6
  Top Layer w0.152: R11.1 94.857,87.993 95.657,88.355 96.582,88.513 96.957,88.26 J2.3
NetJ2_7: J2.7 R13.1 | length 2.9
  Top Layer w0.152: J2.7 97.857,89.113 98.757,90.013 R13.1
OSC: U1.C6 Y1.3 | length 3
  Top Layer w0.152: v1(87.977,79.605) 88.115,80.006 87.961,80.321 Y1.3
  Bottom Layer w0.152: U1.C6 87.216,79.568 87.617,79.43 v1(87.977,79.605)
RCVN: J3.1 U2.21 | length 13.1
  Bottom Layer w0.152: U2.21 95.54,83.238 95.907,83.438 96.562,83.251 97.907,83.912 99.403,84.643 104.573,84.643 106.687,86.757 J3.1
RCVP: J3.2 U2.22 | length 18.3
  Top Layer w0.152: v1(95.284,82.582) 95.537,82.452 96.107,82.714 v1(96.231,82.948)
  Bottom Layer w0.152: U2.22@95.068,83.041 U2.22
  Bottom Layer w0.154: v1(96.231,82.948) 96.441,82.876 96.465,82.868 96.526,82.868 99.296,84.22 99.325,84.234 102.635,84.337 cw(c102.64,84.183) 102.64,84.337 106.752,84.337 108.53,86.115 108.53,87.914 107.671,88.773 107.188,88.773 107.187,88.772 J3.2
SCLK: U1.B1 U2.2 U3.13 | length 9.5
  Top Layer w0.152: v1(89.564,86.387) U3.13
  Bottom Layer w0.152: U1.B1 84.752,83.707 85.259,85.178 88.045,86.537 88.183,86.938 88.902,87.288 89.143,87.206 U2.2
TCK: R10.2 TP6.1 U1.D3 | length 4.7
  Top Layer w0.152: TP6.1 84.183,83.418 84.232,83.283 ; v1(84.032,83.363) 84.232,83.283 ; v2(86.874,81.181) 86.743,81.451 86.609,81.497 86.339,81.365 85.37,81.699 84.658,83.113 84.232,83.283
TDI: R7.1 TP4.1 U1.A5 | length 4.9
  Top Layer w0.152: TP4.1@82.032,81.422 82.582,81.425 82.707,81.388 82.982,81.451 83.612,80.938 v1(83.919,80.853) 84.189,80.984 85.392,80.57 v1(85.699,79.941)
  Bottom Layer w0.152: R7.1 v1(83.919,80.853) ; v1(85.699,79.941) 85.966,79.849 U1.A5
TDO: R6.1 TP3.1 U1.B4 | length 4.2
  Top Layer w0.152: TP3.1 v1(83.612,81.482) 83.702,81.526 85.708,80.835 85.796,80.655 v2(86.33,80.471)
  Bottom Layer w0.152: R6.1 v1(83.612,81.482)
TMS: R8.1 TP5.1 U1.C3 | length 3.8
  Top Layer w0.152: TP5.1@83.507,82.714 83.567,82.62 v1(83.532,82.463) 83.807,81.863 86.425,80.962 v2(86.515,81.006)
pads on no net: TP1_1.1 TP2_1.1 TP3_1.1 TP4_1.1 TP5_1.1 TP6_1.1 TP7_1.1 TP8_1.1 U1.A2 U1.A4 U1.B2 U1.B3 U1.B6 U1.C2 U1.C4 U1.D2 U1.D4 U1.D6 U1.E4 U1.E5 U2.6 U2.7 U2.25 U2.26 U2.35 U2.36 U2.37 U2.38 U3.2 U3.3 U3.4 U3.9 U3.10 U3.11 U4.5 U4.6

## Polygon pours and split planes (outlines as drawn)
+3V3_A on Inner 2 "+3V3_A_L03_P001" (solid, pour order 1): 86.288,86.49 87.291,87.17 89.897,88.441 93.242,89.683 94.688,90.038 95.307,88.338 95.907,87.338 97.999,83.351 99.407,84.052 96.145,82.476 94.273,83.121 93.302,82.647 93.916,81.389 90.274,79.613 88.638,82.967 87.878,83.229
+1V8 on Inner 2 "Inner 2-+1V8" (solid, pour order 3): 100.307,90.438 100.307,89.338 100.807,89.138 101.607,89.138 102.007,87.438 102.007,85.288 98.185,83.442 95.944,87.638 95.415,88.44 94.717,90.045 96.407,90.438
+3V3_D on Inner 2 "+3V3_D_L03_P002" (solid, pour order 2): 86.113,86.392 84.607,85.538 80.607,80.438 82.092,77.401 84.786,76.685 90.209,79.362 88.545,82.775 87.742,83.051
GND on Inner 1 "GND_L02_P000" (solid, pour order 0): 102.007,85.307 102.007,87.438 101.592,89.138 100.807,89.138 100.307,89.638 100.307,90.438 96.367,90.438 93.007,89.638 89.806,88.44 87.207,87.138 84.524,85.487 80.59,80.472 82.807,75.938

## Other copper
Top Layer:
  rectangle net GND: 104.05,88.3 104.6,90.1
  region net GND: 102.086,88.249 102.637,88.252 102.628,90.052 102.077,90.049

## Silkscreen, mask and mechanical layers (free items; w line width, h text height)
Top Overlay:
  circle w0.127: c88.301,86.555 r0.378
  lines w0.076: 79.582,58.238 81.282,54.713 85.274,54.713 101.832,62.663 107.646,62.663 108.582,63.599 108.582,69.338 95.635,69.338 91.066,68.146 85.638,65.571 83.682,64.038 80.579,60.141 cw(c79.929,60.063) 80.007,59.413 79.582,58.938 79.582,58.238
  lines w0.127: 88.333,86.697 ccw(c88.301,86.555) 88.432,86.492
  lines w0.152: 81.957,60.038 cw(c81.957,58.831) 82.867,59.625 ; 82.682,81.338 cw(c82.682,80.131) 83.592,80.925
  text "3.7" at 98.032,90.263 h0.51 r270
  text "0" at 95.232,89.838 h0.51 r280
  text "2019" at 88.882,86.56 h0.51 r26
  text "McMaster University Wireless Systems / Research Group" at 102.6,85.05 h0.3
  text "TCK" at 84.257,83.513 h0.51 r294.65
  text "TMS" at 83.532,82.463 h0.51 r322.58
  text "TDO" at 83.032,81.788 h0.51 r322.11
  text "TDI" at 83.932,80.313 h0.51 r26
  text "3.7" at 82.482,79.561 h0.51 r296
  text "UCSD/OSP Mac Variant" at 90.976,78.893 h0.51 r26
  text "0" at 83.176,78.042 h0.51 r296
  text "3.7" at 97.307,68.963 h0.51 r270
  text "0" at 94.507,68.538 h0.51 r280
  text "McMaster University Wireless Systems / Research Group" at 101.875,63.75 h0.3
  text "3.7" at 81.757,58.261 h0.51 r296
  text "0" at 82.451,56.742 h0.51 r296
Bottom Overlay:
  text "DGTL BTE-" at 100.332,84.763 h0.51 r26
  text "RIC V2" at 90.682,80.063 h0.51 r26
  text "0 D+ D− 3.7" at 83.807,77.038 h0.51 r296
Mechanical 1:
  lines w0.051: 97.12,90.56 93.076,89.727 89.753,88.385 86.388,86.16 93.608,81.392 99.338,84.187 100.646,85.326 101.607,85.238 101.618,87.441 100.712,87.472 100.741,90.434
Board:
  lines w0.076: 80.307,79.538 82.007,76.013 85.999,76.013 102.557,83.963 108.371,83.963 109.307,84.899 109.307,90.638 96.36,90.638 91.791,89.446 86.363,86.871 84.407,85.338 81.304,81.441 cw(c80.654,81.363) 80.732,80.713 80.307,80.238 80.307,79.538 ; 100.307,89.738 100.307,89.738
Mechanical 15:
  lines w0.08: 100.307,90.278 102.782,90.278 102.782,87.5 102.257,87.488
  lines w0.09: 96.071,85.454 97.235,86.003 ; 96.282,84.705 97.752,85.389
  lines w0.1: 97.707,86.367 97.707,86.088 98.482,86.088 ; 98.63,86.871 99.294,86.866
  text "MK1" at 103.667,89.938 h0.31
  text "C25" at 97.244,86.772 h0.2 r24
  text "+" at 98.657,86.287 h0.5
  text "C35" at 98.792,85.682 h0.31
  text "+" at 97.133,85.278 h0.5 r23